# Altium PCB CT310高端控制盒基板电路V1.1.PcbDoc (part 2 of 3)
Units mil, origin at the board's own origin, x right, y up, seen from the top; angles counter-clockwise.
Board outline 8162.61 x 6196.81 mil, 2 copper layers (Top Layer, Bottom Layer), stack 65.792 mil thick; 275 components, 181 nets, 942 pads, 304 vias.
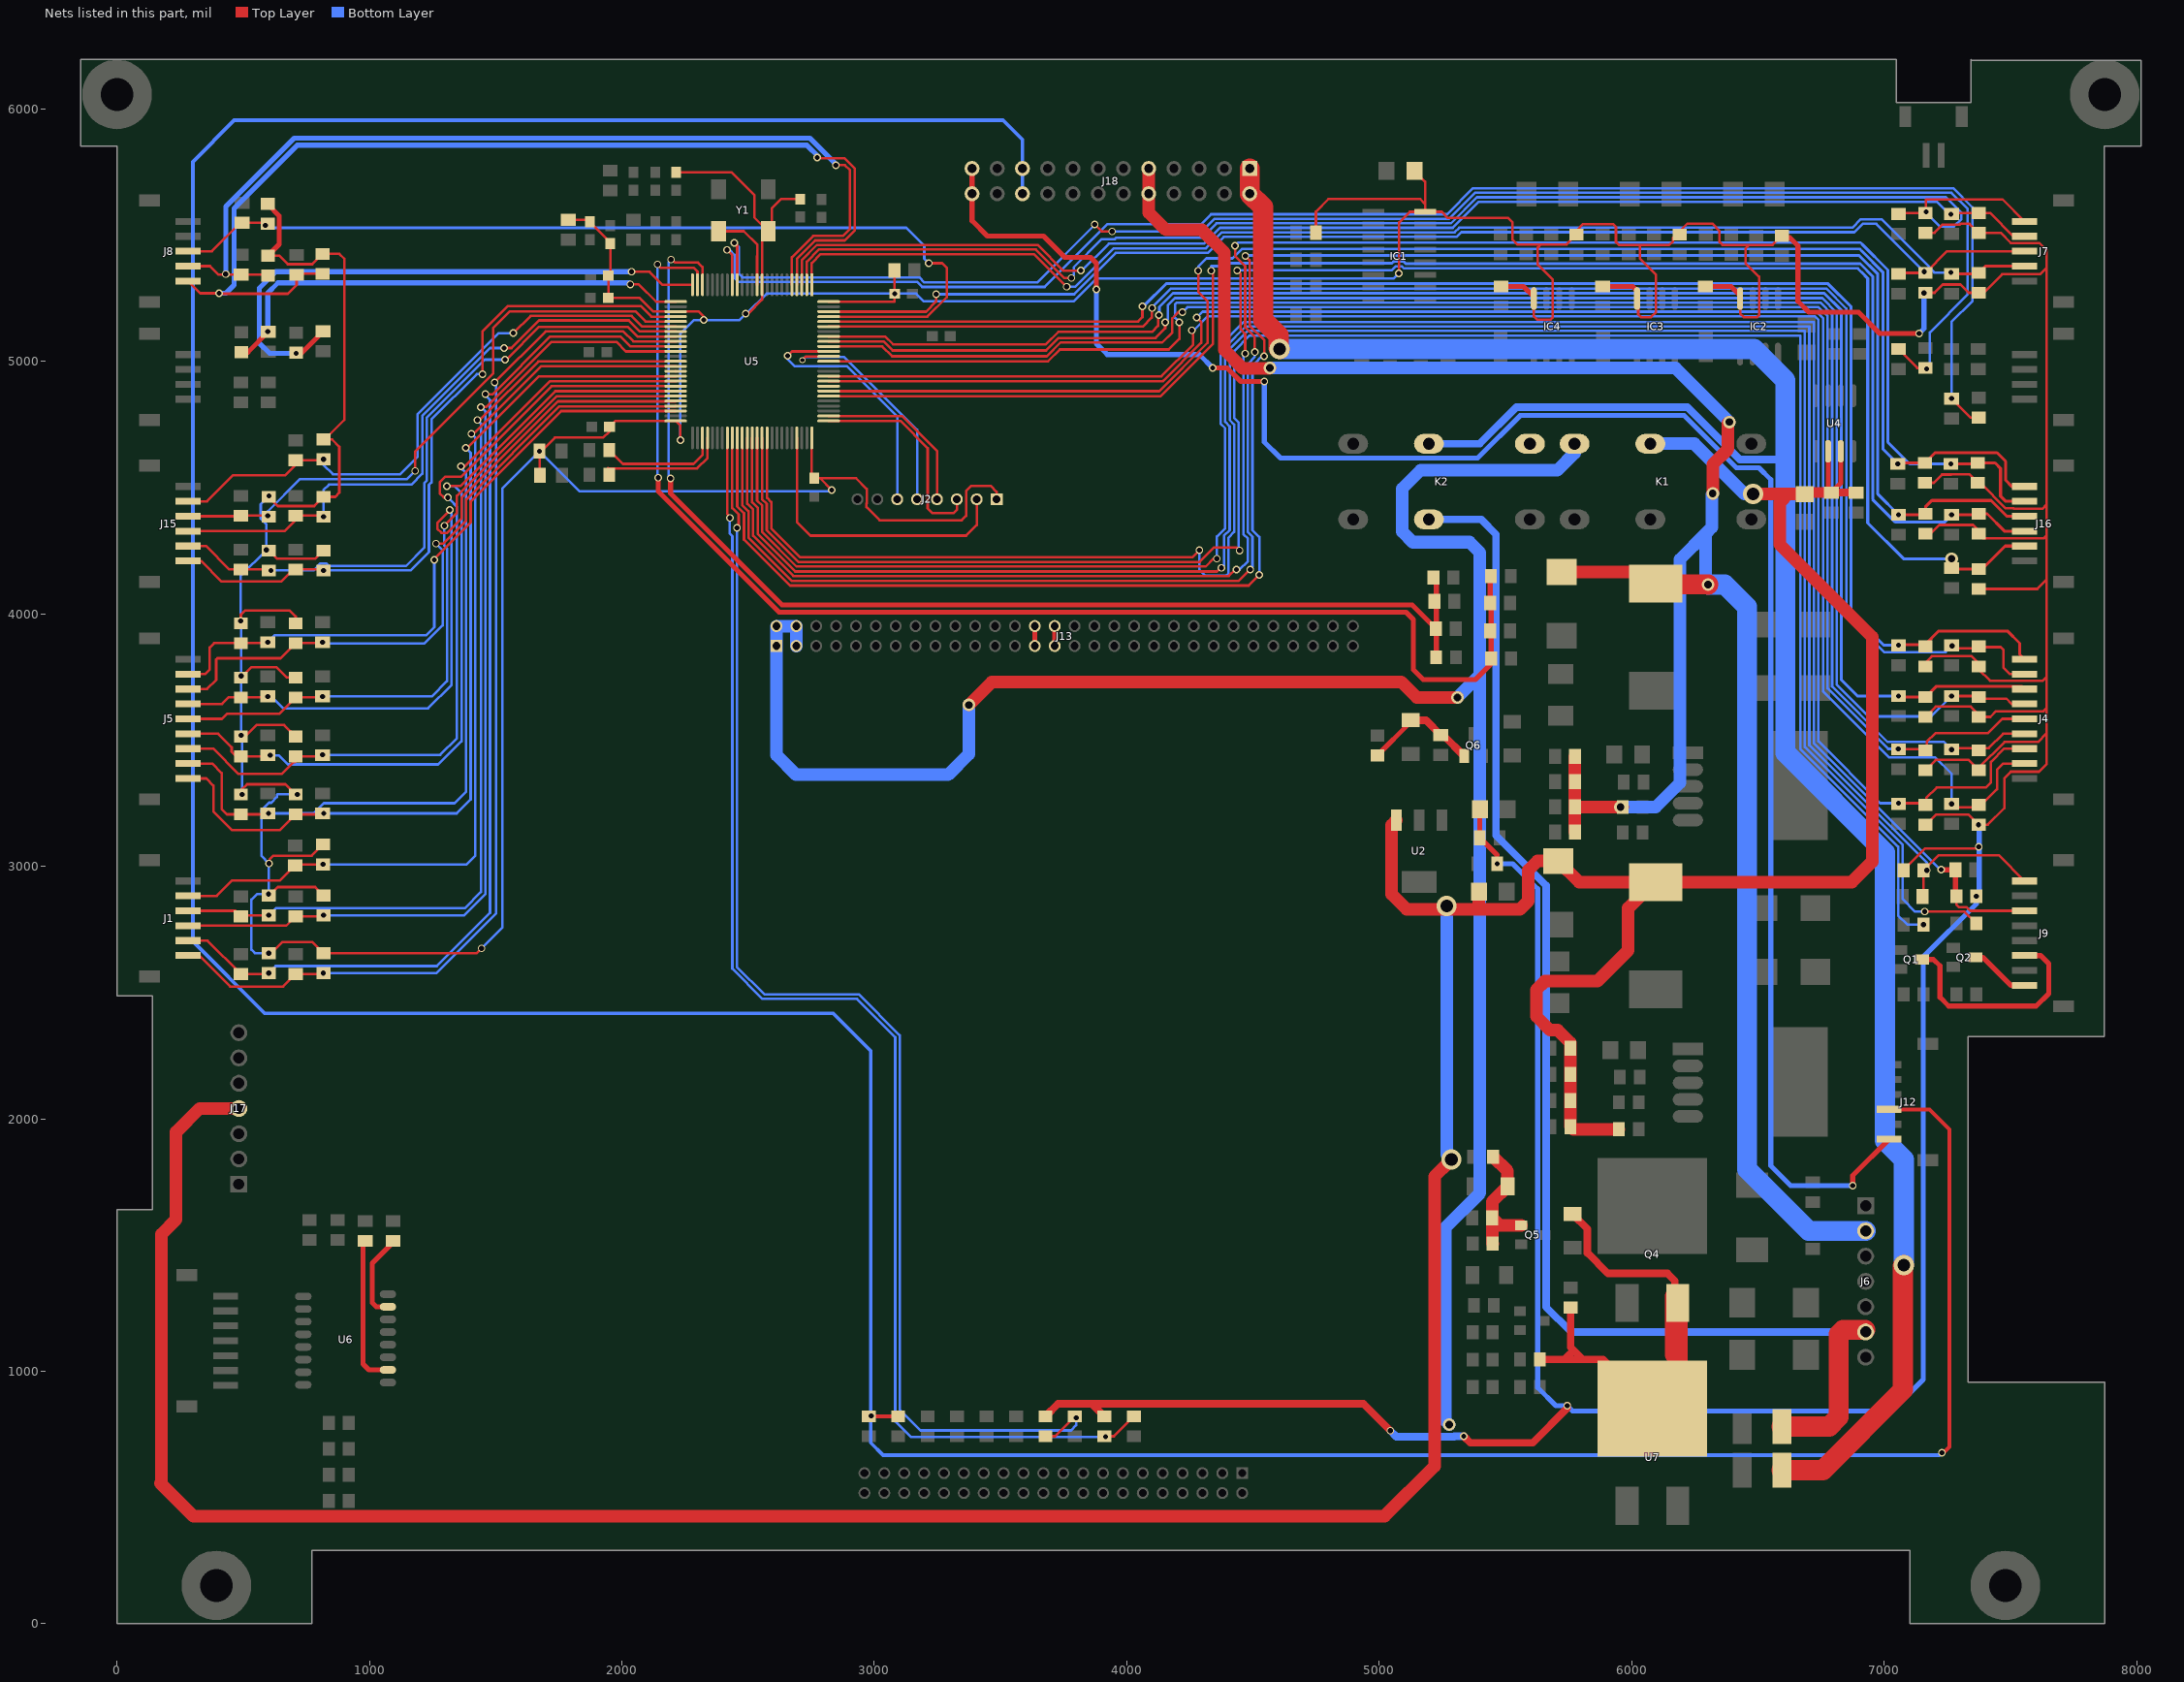
[diagram p2: the nets of this part, all layers, seen from the top]

## Via types
v1: diameter 30, hole 20, Top Layer to Bottom Layer, tented both sides, 229 vias
v2: diameter 60, hole 30, Top Layer to Bottom Layer, tented both sides, 35 vias
v3: diameter 50, hole 30, Top Layer to Bottom Layer, tented both sides, 22 vias
v4: diameter 80, hole 50, Top Layer to Bottom Layer, tented both sides, 12 vias
v5: diameter 50, hole 28, Top Layer to Bottom Layer, tented both sides, 4 vias
v6: diameter 24, hole 16, Top Layer to Bottom Layer, tented both sides, 1 vias
v7: diameter 30, hole 16, Top Layer to Bottom Layer, tented both sides, 1 vias

## Nets (pads, with @x,y where several pads share a name; then routed paths per layer and width w, separated by ;. In a path a pad name is that pad's centre, name@x,y a point inside that pad or via, vN(x,y) a via of type N, cw(c..) or ccw(c..) an arc to the next point about the centre after c; other vN are vias at no path point) (continued)
+3.3V_S: C6.1 C9.2 C92.2 C93.2 C95.2 C96.1 C97.1 C98.1 C100.1 C102.1 C104.1 C108.1 C112.2 C113.2 C114.2 C115.2 D60.1 D61.1 IC1.16 IC2.8 IC3.8 IC4.8 J2.1 L1.1 L4.1 R13.2 R14.2 R15.2 R16.2 R17.2 R23.2 R24.2 R25.2 R26.2 R31.2 R32.2 R33.2 R34.2 R39.2 R40.2 R41.2 R42.2 R45.1 R47.2 R48.2 R49.2 R50.2 R53.1 R55.2 R56.2 R59.2 R60.2 R61.2 R65.2 R66.2 R67.2 R71.2 R72.2 R73.2 R77.2 R78.2 R79.2 R85.2 R86.2 R89.2 R90.2 R93.2 R99.1 R109.1 R112.1 R115.1 U5.11 U5.28 U5.50 U5.75 U5.100 Y1.4 | length 38986.3
  Top Layer w10: R33.2@491,3301.3 514.93,3325.22 667.09,3325.22 R25.2@707.65,3284.67 ; R50.2@491,3972 491,3997.3 507.7,4014 683.7,4014 707.65,3990.06 R42.2@707.65,3962.73 ; R34.2@494.49,3751.22 531.56,3788.29 632.27,3788.29 672.83,3747.73 R26.2@707.65,3747.73 ; R49.2@507.37,3514.67 552.7,3560 662.31,3560 R41.2@707.65,3514.67 ; R77.2@598.41,5419.01 642.86,5419.01 676.7,5385.17 773.47,5385.17 R71.2@814.03,5425.73 880.98,5425.73 900.7,5406 900.7,4768 R79.2@823.74,4691.04 ; R61.2@601.32,4250.67 633.99,4218 672.75,4218 ; R73.2@601.32,4462.38 636.7,4427 781.3,4427 R67.2@817.97,4463.67 864.37,4463.67 880.7,4480 880.7,4662 851.67,4691.04 R79.2@823.74,4691.04 ; R16.2@604.7,2886 636.7,2918 784.82,2918 R15.2@817.97,2884.85 ; 604.7,3027 619.7,3042 771.37,3042 R17.2@815.97,3086.6 ; R14.2@611.06,2656.35 654.7,2700 774.32,2700 R13.2@817.97,2656.35 1425.06,2656.35 v1(1443.7,2675) ; 672.77,4217.98 785.28,4217.98 R56.2@817.97,4250.67 ; R79.2@817.97,4691.04 R79.2@823.74,4691.04 ; D61.1@1675.66,4548.69 1673.69,4550.65 v1(1673.69,4644.29) 1680.46,4644.29 1734.16,4698 1925.7,4698 1951.34,4723.63 C102.1@1951.34,4741.29 1974.12,4764.07 U5.50@2212.85,4764.07 2231.7,4745.22 v1(2231.7,4688) ; C95.2@1787,5560.67 1865.13,5560.67 C92.2@1873,5552.79 1954,5471.79 L4.1@1954,5467.18 1954,5347.86 C97.1@1946.43,5340.3 1946.43,5251.39 C104.1@1946.34,5251.29 2070.41,5251.29 2124.56,5197.14 U5.28@2212.85,5197.14 ; U5.28@2213,5197.3 ccw(c2213,5197.14) U5.28@2212.85,5197.14 ; C93.2@2215,5748.73 2434.98,5748.73 2524.7,5659 2524.7,5570.34 Y1.4@2579.43,5515.62 ; v1(2324.7,5164) 2324.7,5177 2303.62,5198.08 2211.91,5198.08 U5.28@2212.85,5197.14 ; v1(2490.7,5189) 2500,5189 2555.37,5244.37 U5.11@2555.37,5303.44 2555.37,5491.56 Y1.4@2579.43,5515.62 ; R99.1@2706,5642.73 2630.43,5642.73 2593.7,5606 2593.7,5529.9 Y1.4@2579.43,5515.62 ; U5.75@2752.22,4697.15 2752.22,4546.92 C100.1@2761.71,4537.43 2784.27,4537.43 ; U5.100@2819.15,5236.51 3080.47,5236.51 v1(3080.47,5268.29) C96.1@3080.47,5355 ; v1(2831.7,4490) 2784.27,4537.43 ; J2.1@3484.3,4454 3484.3,4483.41 3460.7,4507 3384.7,4507 3363.44,4485.73 3363.44,4388.73 3345.7,4371 3020.7,4371 2968.7,4423 2968.7,4436.77 2969.74,4437.8 2969.74,4494.97 2927.27,4537.43 2784.27,4537.43 ; C108.1@4749.02,5509.89 4749.02,5593.32 4799,5643.3 5162,5643.3 5181.36,5623.93 ; v1(5077,5349) 5078.7,5350.7 5078.7,5550 5121,5592.3 IC1.16@5181.36,5592.3 ; C112.2@5139.12,5754 5181.36,5711.76 5181.36,5623.93 ; IC4.8@5612.44,5249.05 5612.44,5178.28 5625.72,5165 5678.72,5165 5686.72,5173 5686.72,5204.25 5687.44,5204.98 5687.44,5323.28 5627.72,5383 5627.72,5451 5639.72,5463 ; IC3.8@6020.94,5249.05 6025.72,5244.28 6025.72,5186 6036.72,5175 6076.17,5175 6095.94,5194.78 6095.94,5343.33 6032.72,5406.56 6032.72,5460.27 ; IC2.8@6429.44,5249.05 6429.44,5189.28 6443.72,5175 6496.72,5175 6504.44,5182.72 6504.44,5335.28 6450.72,5389 6450.72,5446.2 6465.52,5461 ; R109.1@6594.73,5497.39 6558.35,5461 6465.52,5461 ; R86.2@7076.63,2984.29 7163.34,3071 v1@7364.7,3071 ; R55.2@7160.98,4519.3 7196.42,4519.3 7229.11,4551.98 7264.68,4551.98 7266,4553.3 7337,4553.3 R60.2@7371,4519.3 7380.41,4519.3 7481.7,4418 7511.7,4418 7513.7,4416 7626.7,4416 7642.7,4432 ; R40.2@7163.98,3164.93 7165.63,3164.93 7206.19,3205.48 7301.93,3205.48 7303.12,3204.3 7334.63,3204.3 v1(7374,3164.92) 7410.63,3164.92 7475.7,3230 7475.7,3348.93 7501.63,3374.85 7613.56,3374.85 7642.7,3404 7642.7,3526 ; R24.2@7163.98,3380.93 7204.54,3421.48 7334.81,3421.48 R32.2@7369,3387.3 ; R39.2@7163.98,3591.93 7204.54,3632.48 7342.81,3632.48 R47.2@7374,3601.3 ; R23.2@7164,3807.3 7189.19,3832.48 7345.81,3832.48 R31.2@7374,3804.3 ; R66.2@7163.98,4317.43 7184.13,4317.43 7219,4352.3 7352.41,4352.3 R72.2@7376.7,4328 ; R89.2@7163.98,5271.93 7199.4,5271.93 7232.09,5304.61 7301.91,5304.61 7334.6,5271.93 R93.2@7373.98,5271.93 7394.63,5271.93 7467.7,5345 7617.7,5345 7642.7,5370 ; R59.2@7163.98,5508.93 7199.4,5508.93 7232.09,5541.61 7299.32,5541.61 7302.7,5545 7337.91,5545 R65.2@7373.98,5508.93 7461.28,5508.93 7501.63,5468.57 7615.13,5468.57 7642.7,5441 7642.7,5370 ; R32.2@7374,3380.93 7374,3390.1 7476.87,3492.96 7609.67,3492.96 7642.7,3526 ; R47.2@7374,3591.92 7420.63,3591.92 7442.7,3614 7630.7,3614 7642.7,3626 ; R31.2@7374,3791.93 7374,3780.7 7419.7,3735 7501.31,3735 7501.63,3734.68 7627.39,3734.68 7642.7,3750 ; R78.2@7374,4098.93 7606.63,4098.93 7642.7,4135 ; R72.2@7374,4317.43 7391.43,4300 7633.7,4300 7642.7,4309 ; IC1.16@5181.36,5592.3 5247.41,5592.3 5271.7,5568 5510.72,5568 5527.72,5551 5527.72,5482 5546.72,5463 5639.72,5463 ; IC1.16@5181.36,5592.3 5181.36,5623.93 ; 5639.72,5463 5742.35,5463 R115.1@5781.73,5502.39 5781.73,5518.02 5807.72,5544 5925.72,5544 5937.72,5532 5937.72,5473 5950.45,5460.27 6032.72,5460.27 ; 6032.72,5460.27 6147.62,5460.27 6163.53,5476.19 6163.53,5488.81 6220.72,5546 6318.69,5546 6334.29,5530.39 6334.29,5529.43 6347.72,5516 6347.72,5473 6359.72,5461 6465.52,5461 ; 7642.7,3526 7642.7,3626 ; 7642.7,3626 7642.7,3750 ; 7642.7,3750 7642.7,4135 ; 7642.7,4135 7642.7,4309 ; 7642.7,4309 7642.7,4432 ; 7642.7,4432 7642.7,5370
  Top Layer w20: R85.2@597.39,5624.01 597.39,5621.91 642.95,5576.35 642.95,5463.55 R77.2@598.41,5419.01 ; C6.1@5403.88,3219.3 5397.98,3213.39 C9.2@5397.98,3113.3 5466.87,3044.4 ; C115.2@5482.7,5296.95 5570.8,5296.95 5612.44,5255.31 IC4.8@5612.44,5249.05 ; C114.2@5888.73,5296.95 6003.8,5296.95 6020.94,5279.81 IC3.8@6020.94,5249.05 ; C113.2@6291.13,5296.95 6393.8,5296.95 6429.44,5261.31 IC2.8@6429.44,5249.05 ; R109.1@6594.73,5497.39 6602.44,5489.68 6626.96,5489.68 6658.7,5457.94 6658.7,5238 6701.36,5195.35 6898.12,5195.35 6982.46,5111 v1(7138.7,5111)
  Top Layer w30: R53.1@3677.7,821.37 3728.33,872 3860.41,872 ; R45.1@3911.04,821.37 3860.41,872 ; v1(5043.7,765) 4936.7,872 3860.41,872 ; v1(5334.7,743) 5360.7,717 5607.7,717 5744.7,854 v1(5744.7,864)
  Bottom Layer w10: v1(495.37,3284.67) 495.37,3522.33 v1(491.7,3518.67) v1(491.7,3754) 491.7,3970 v1(489.7,3972) 489.7,4151 v1(591.7,4253) 591.7,4354.94 569.38,4377.26 569.38,4434.68 v1(601.7,4467) ; v1@600.7,3009 v1(600.7,2890) 554.7,2890 532.7,2868 532.7,2670 546.35,2656.35 v1(601.32,2656.35) ; v1(602.7,3011) 571.7,3042 571.7,3220.6 603.11,3252 611.44,3252 633.7,3274.26 633.7,3282.6 636.11,3285 v1(714.7,3285) ; v1(1443.7,2675) 1526.7,2758 1526.7,4497.31 v1(1673.69,4644.29) 1832.99,4485 2826.7,4485 v1(2831.7,4490) ; v1(2231.7,4688) 2231.7,5110 2285.7,5164 v1(2324.7,5164) 2465.7,5164 v1(2490.7,5189) 2493.7,5189 2573,5268.29 v1(3080.47,5268.29) 3165.81,5268.29 3196.11,5238 3789.13,5238 3879.13,5328 5056,5328 v1(5077,5349)
  Bottom Layer w20: v1(5466.87,3010.3) 5528.74,3010.3 5627.7,2911.33 5627.7,936 5699.7,864 v1(5744.7,864) 5765.7,843 7030.38,843 7155.17,967.79 7155.17,2641.46 7364.94,2851.23 v1(7364.94,2881.77) 7376.7,2893.54 v1@7376.7,3164.92 ; v1(7138.7,5111) 7157.7,5130 v1(7157.7,5271)
  Bottom Layer w30: v1(5043.7,765) 5067.7,741 5296.59,741 5298.59,743 v1(5334.7,743)
  other v1: 7374.7,3077
+5V_OUT: J13.1 J13.2 J13.3 J13.4 K1.4 | length 8900.8
  Top Layer w50: v3(3374.7,3639) 3465.7,3730 5087.7,3730 5148.7,3669 v3(5309.7,3669)
  Bottom Layer w50: J13.3@2690.89,3872.87 J13.4@2690.89,3951.61 J13.2@2612.15,3951.61 J13.1@2612.15,3872.87 2612.15,3440.56 2689.7,3363 3292.7,3363 3374.7,3445 v3(3374.7,3639) ; v3(5276.7,789) 5261.7,804 5261.7,1569.25 5398.7,1706.25 5398.7,4036 ; v3(5309.7,3669) 5398.7,3758 5398.7,4036 ; K1.4@5773.7,4674 5773.7,4637 5705.7,4569 5163.7,4569 5090.7,4496 5090.7,4326 5132.7,4284 5357.7,4284 5398.7,4243 5398.7,4036
+5V_S: C4.1 C7.1 C10.2 C11.2 C13.2 C14.2 C79.2 C80.2 C81.2 J17.4 K1.3 L2.1 R2.1 U2.3 U4.2 U4.3 | length 16121.1
  Top Layer w20: C79.2@6685.41,4474.41 6703.61,4492.61 6778.12,4492.61 U4.2@6778.12,4644.05 ; C80.2@6790.41,4480.32 6828.12,4518.03 U4.3@6828.12,4644.05
  Top Layer w30: C79.2@6685.41,4474.41 6784.5,4474.41 C80.2@6790.41,4480.32 C81.2@6889.41,4480.32
  Top Layer w50: J17.4@482.7,2041 327.7,2041 234.2,1947.5 234.2,1601.27 175.7,1542.77 175.7,559 172.7,556 302.26,426.44 5021.38,426.44 5218.7,623.76 5218.7,1772 v4@5275.7,1829 ; U2.3@5067.45,3182.34 5048.7,3163.6 5048.7,2889.65 5108.36,2830 5394.59,2830 ; C4.1@5394.59,2900 5394.59,2830 ; R2.1@5948.76,1958.3 5767.78,1958.3 C11.2@5756.78,1969.3 C13.2@5756.78,2280.29 5756.78,2301.37 5706.43,2351.72 5676.11,2351.72 5622.56,2405.28 5622.56,2511.36 5656.19,2545 5864.11,2545 5986.41,2667.3 5986.41,2834.89 6089.41,2937.89 5791.8,2937.89 C7.1@5708.7,3020.98 5626.69,3020.98 5590.7,2985 5590.7,2863 5557.7,2830 5394.59,2830 ; L2.1@6094.7,2937.89 6871.89,2937.89 6952.7,3018.7 6952.7,3908.94 6586.7,4274.94 6586.7,4440 6603.7,4457 ; v4(6480.7,4474.41) C79.2@6685.41,4474.41
  Bottom Layer w50: v4(5266.7,2843) 5266.7,1858 v4(5285.7,1839) ; K1.3@6073.7,4674 6247.7,4674 6447.29,4474.41 v4(6480.7,4474.41)
+7.2V_S: C72.1 C73.2 C74.2 C75.2 C88.2 J6.2 J18.9 J18.10 L3.1 R30.1 | length 8945.7
  Top Layer w50: J18.9@4086.75,5763.97 J18.10@4086.75,5663.97 4086.75,5589.25 4155.5,5520.5 4297.5,5520.5 4386.7,5431.3 4386.7,5045.12 4459.82,4972 4564.7,4972 v3(4566.7,4974) ; C72.1@5722.7,4165.98 L3.1@6049.32,4165.98 ; C88.2@5775.07,3136 C75.2@5775.07,3235.67 ; C73.2@5775.07,3435 C74.2@5775.07,3335.33 C75.2@5775.07,3235.67 ; R30.1@5963.68,3235.67 C75.2@5775.07,3235.67 ; v3(6320.7,4477) 6320.7,4592 6381.65,4652.94 6381.65,4754.94 v3(6386.7,4760)
  Top Layer w80: L3.1@6198.01,4117 6301.7,4117 v3(6302.7,4116)
  Bottom Layer w50: v3(4566.7,4974) 6172.7,4974 v3(6386.7,4760) ; v3(5955.69,3235.01) 6094.72,3235.01 6190.7,3331 6190.7,4216 6293.2,4318.5 ; v3(6302.7,4116) 6293.2,4125.5 6293.2,4318.5 ; v3(6320.7,4477) 6317.7,4474 6317.7,4343 6293.2,4318.5
  Bottom Layer w80: v3(6302.7,4116) 6368.7,4116 6456.7,4028 6456.7,1801 6701.7,1556 J6.2@6926.7,1556
BAT1+: F1.1 J18.1 J18.2 K2.3 | length 9193.9
  Top Layer w80: J18.1@4486.75,5763.97 J18.2@4486.75,5663.97 4539.7,5611.02 4539.7,5164 4600.7,5103 4600.7,5053.3 v4(4605,5049) ; F1.1@6594.44,608 6756.7,608 7074.7,926 7074.7,1417 v4(7077.7,1420)
  Bottom Layer w30: K2.3@5196.7,4674 5397.7,4674 5542.7,4819 6220.82,4819 6428.19,4611.63 6586.13,4611.63 6608.76,4589
  Bottom Layer w80: v4(4605,5049) 4654.7,5049 4654.34,5049.37 6484.34,5049.37 6608.76,4924.94 6608.76,4589 6608.76,3449.42 7002.7,3055.48 7002.7,1914.5 7077.7,1839.5 v4(7077.7,1420)
BAT1_ADC: C15.1 C17.1 R21.2 R27.2 U5.23 | length 4696.1
  Top Layer w10: v1(2194.7,5403) 2198.7,5403 2210.41,5391.3 2302,5391.3 2319.15,5374.14 U5.23@2319.15,5303.44
  Top Layer w20: v1(2192.7,4537) 2192.7,4476.46 2634.16,4035 5130.33,4035 C15.1@5224.04,3941.3 ; R27.2@5226.04,3828.3 R21.2@5226.04,4130.3
  Bottom Layer w10: v1@2194.7,4537 2185.7,4546 2185.7,5394 v1(2194.7,5403)
BAT2+: F2.1 J6.6 K2.6 | length 5419.9
  Top Layer w80: F2.1@6594.44,781 6781.71,781 6819.7,819 6819.7,1146 6837.7,1164 J6.6@6924.7,1164
  Bottom Layer w30: K2.6@5196.7,4374 5403.7,4374 5462.7,4315 5462.7,3123 5660.7,2925 5660.7,1255 5759.7,1156 J6.6@6926.7,1156
BAT2_ADC: C16.1 C18.1 R22.2 R28.2 U5.24 | length 5306.2
  Top Layer w10: v1@2139.7,5384 v1(2140.7,5384) ; v1@2140.2,5383.5 2153.41,5370.3 2285,5370.3 2299.46,5355.83 U5.24@2299.46,5303.44
  Top Layer w20: v1(2143.7,4539) 2143.7,4485.86 2622.57,4007 5105.7,4007 5134.7,3978 5134.7,3779.4 5174.11,3740 5380.68,3740 5441.98,3801.3 C16.1@5441.98,3912.28 ; R22.2@5439.04,4145.7 C18.1@5439.04,4043.3 5442.98,4039.36 R28.2@5442.98,3823.28
  Bottom Layer w10: v1@2140.7,4539 v1(2140.7,5384)
BAT_IN: D3.2 Q4.3 R9.2 R12.1 U7.2 | length 2109
  Top Layer w30: R9.2@5636.37,1047.3 5734,1047.3 ; 5755.11,1068.41 5734,1047.3 ; R12.1@5758.11,1252.99 5758.11,1095 5805.81,1047.3 ; D3.2@5765,1623.22 5824.7,1563.52 5824.7,1468.84 5906.25,1387.3 6141.7,1387.3 6171,1358 Q4.3@6171,1295.65 ; U7.2@6082,852 5886.7,1047.3 5805.81,1047.3 ; 5734,1047.3 5805.81,1047.3
  Top Layer w80: U7.2@6082,852 6182,952 Q4.3@6182,1270.65 ; 6171,1067.25 6171,1079.25 ; Q4.3@6171,1295.65 6171,1079.25 ; 6176,1079.25 6171,1079.25
CLOCK: U5.12 Y1.3 | length 335.1
  Top Layer w10: Y1.3@2382.57,5515.62 2482.68,5515.62 2536.7,5461.6 2536.7,5417.4 2535.68,5416.38 U5.12@2535.68,5303.44
CVBS: J12.4 J18.19 J18.20 R46.2 R51.2 | length 17057.3
  Top Layer w15: R51.2@2977.7,821.37 R46.2@3094.37,821.37 ; J12.4@7019.93,2037.47 7179.17,2037.47 7258.32,1958.33 7258.32,700.61 7235.7,678 v1(7228.7,678)
  Bottom Layer w15: J18.20@3586.75,5663.97 J18.19@3586.75,5763.97 3586.75,5878.25 3510,5955 464.64,5955 300.2,5790.56 300.2,2702.56 584.8,2417.96 2836.68,2417.96 2985.74,2268.9 2985.74,716.96 3034.2,668.5 7219.2,668.5 v1(7228.7,678)
  other v1: 2987.7,823
GND_P: K2.1
JNRST: J2.6 U5.90 | length 1039.1
  Top Layer w10: v1(2656.7,5022) 2674.37,5039.66 U5.90@2819.15,5039.66
  Bottom Layer w10: v1(2656.7,5022) 2656.7,5009 2685.41,4980.3 2725.36,4980.3 2726.06,4981 2891.25,4981 3090.6,4781.65 J2.6@3090.6,4454
JOYSTICK_LEFTX: C23.1 R6.1 U5.16 | length 6205.2
  Top Layer w10: v1(2445.7,5470) 2456.94,5458.76 U5.16@2456.94,5303.44 ; v1(3872.7,5542) 3899.7,5515 v1(3941.7,5515) ; C23.1@7057,5048.73 7131.8,4973.92 R6.1@7163.98,4973.92
  Bottom Layer w10: v1(2445.7,5470) 2463.7,5452 2463.7,5346 2477.41,5332.29 3177.85,5332.29 3197.14,5313 3644.7,5313 3872.7,5541 v1(3872.7,5542) ; 3957,5515 4298,5515 4348,5565 5276.37,5565 5379.37,5668 7266.2,5668 7331.02,5603.18 7331.02,5265.32 7180.7,5115 7180.7,4981 7169.7,4970 v1(7167.7,4970)
JOYSTICK_LEFTY: C25.1 R8.1 U5.17 | length 6316.6
  Top Layer w10: v1(2416.7,5442) 2437.26,5421.44 U5.17@2437.26,5303.44 ; v1(7267.02,4852.73) 7341.82,4777.93 R8.1@7374,4777.93
  Bottom Layer w10: v1(2416.7,5442) 2425.7,5442 2445.7,5422 2445.7,5331 2462.41,5314.29 3170.39,5314.29 3189.69,5295 3674.3,5295 3922.3,5543 4294,5543 4334,5583 5268.91,5583 5371.91,5686 7273.65,5686 7349.02,5610.63 7349.02,5238 7267.02,5156 v1(7267.02,4852.73)
JOYSTICK_RIGHTX: C24.1 R7.1 U5.26 | length 1956
  Top Layer w10: v1(2033.7,5305) 2066.7,5305 2135.19,5236.51 U5.26@2212.85,5236.51
  Top Layer w20: R7.1@493,5036.93 518.61,5036.93 C24.1@599.35,5117.67
  Bottom Layer w20: v1(597.04,5117.67) 597.04,5270.33 637.7,5311 2027.7,5311 v1(2033.7,5305)
JOYSTICK_RIGHTY: C26.1 R29.1 U5.25 | length 2288.1
  Top Layer w10: v1(2038.7,5355) 2109.7,5355 2161.26,5303.44 U5.25@2279.78,5303.44
  Top Layer w20: v1(709.65,5031.94) R29.1@709.65,5034.93 732.26,5034.93 C26.1@816,5118.67
  Bottom Layer w20: v1(709.65,5031.94) 604.76,5031.94 564.04,5072.67 564.04,5290.33 628.7,5355 v1(2038.7,5355)
JTCK: J2.3 U5.76 | length 846.2
  Top Layer w10: U5.76@2819.15,4764.07 3103.63,4764.07 3211.45,4656.25 3211.45,4417.25 3229.7,4399 3313.7,4399 3326.82,4412.11 J2.3@3326.82,4454
JTDI: J2.4 U5.77 | length 677.5
  Top Layer w10: U5.77@2819.15,4783.76 3109.4,4783.76 3248.08,4645.09 J2.4@3248.08,4454
JTDO: J2.5 U5.89 | length 964.2
  Top Layer w10: v6(2715,5005.3) 2729.69,5019.98 U5.89@2819.15,5019.98
  Bottom Layer w10: v6(2715,5005.3) 2727.7,5018 2879.7,5018 3169.34,4728.37 J2.5@3169.34,4454
JTMS: J2.2 U5.72 | length 1187.6
  Top Layer w10: U5.72@2693.16,4697.15 2693.16,4363.69 2746.85,4310 3363.7,4310 3405.56,4351.85 J2.2@3405.56,4454
KEYSWIN_ED: C51.1 J16.2 R60.1 U5.61 | length 7844.2
  Top Layer w10: U5.61@2476.63,4697.15 2476.63,4430.99 2501.7,4405.91 2501.7,4301.81 2673.51,4130 4442.7,4130 v1(4488.7,4176) ; v1(4429,5458) 4429,5418 4468.7,5378.3 4468.7,5134.59 4506.7,5096.59 v1(4506.7,5037)
  Top Layer w12: v1(7264.02,4594.1) 7367.06,4594.1 R60.1@7371,4598.04 7439.26,4598.04 7461,4576.3 7461,4466.3 7481.42,4445.88 J16.2@7556.23,4445.88
  Bottom Layer w10: v1(4429,5458) 4442,5471 6905.84,5471 6914,5462.84 ; v1(4488.7,4176) 4497.7,4185 4497.7,4305.54 4479.43,4323.82 4479.43,4990.18 4506.7,5017.46 v1(4506.7,5037)
  Bottom Layer w12: 6914,5462.84 7014.7,5362.14 7014.7,4680 7100.6,4594.1 v1(7264.02,4594.1)
KEYSWIN_EL: C54.1 J16.3 R66.1 U5.60 | length 7975
  Top Layer w10: U5.60@2456.94,4697.15 2456.94,4425.22 2483.7,4398.46 2483.7,4294.35 2666.06,4112 4482.7,4112 v1(4524.7,4154) ; v1(4470,5418) 4486.7,5401.3 4486.7,5142.05 4544.7,5084.05 4544.7,5020.7 v1(4544,5020)
  Top Layer w12: v1(7057,4392.23) 7160.04,4392.23 R66.1@7163.98,4396.17 7163.98,4424.27 7189,4449.3 7423.54,4449.3 7486.01,4386.82 J16.3@7556.23,4386.82
  Bottom Layer w10: v1(4524.7,4154) 4524.7,4304 4497.43,4331.27 4497.43,4982.73 4544,5029.3 v1(4544,5020)
  Bottom Layer w12: v1@4475,5419 6901.27,5419 6974.7,5345.57 6974.7,4474.53 v1(7057,4392.23)
KEYSWIN_EM: C60.1 J16.5 R78.1 U5.62 | length 7865.4
  Top Layer w10: U5.62@2496.31,4697.15 2496.31,4436.76 2519.7,4413.37 2519.7,4309.27 2678.97,4150 4403.7,4150 v1@4431.7,4178 ; v1(4437,5360) 4450.7,5346.3 4450.7,5127.14 4468.7,5109.14 v1(4468.7,5031)
  Top Layer w12: C60.1@7267.02,4181.6 v5(7267.02,4218.32) ; C60.1@7270.96,4177.67 R78.1@7374,4177.67 7388.37,4177.67 7479.42,4268.71 J16.5@7556.23,4268.71
  Bottom Layer w10: v1(4434.7,4175) 4446.7,4175 4479.7,4208 4479.7,4298.09 4461.43,4316.36 4461.43,5023.73 v1(4468.7,5031) ; v1@4437,5361 5049.4,5361 5065.4,5377 5088.6,5377 5097.6,5368 6895.7,5368 6910.85,5352.85
  Bottom Layer w12: 6910.85,5352.85 6934.7,5329 6934.7,4360 7076.39,4218.32 v5(7267.02,4218.32)
KEYSWIN_ER: C57.1 J16.4 R72.1 U5.81 | length 6118.6
  Top Layer w10: U5.81@2819.15,4862.5 2820.08,4861.56 4133.64,4861.56 4340.89,5068.82 4340.89,5352.11 v1(4334,5359)
  Top Layer w12: v1(7267.02,4392.23) 7370.06,4392.23 R72.1@7374,4396.17 7408.13,4396.17 7476.53,4327.77 J16.4@7556.23,4327.77
  Bottom Layer w12: 4334,5377 4392.87,5377 4404.87,5389 5050.53,5389 5057.53,5396 5096.47,5396 5105.47,5387 6904.99,5387 6954.7,5337.28 6954.7,4453.52 7044.99,4363.23 7238.02,4363.23 v1(7267.02,4392.23)
KEYSWIN_EU: C48.1 J16.1 R55.1 U5.82 | length 6064.1
  Top Layer w10: U5.82@2819.15,4882.18 4128.8,4882.18 4319.7,5073.09 4319.7,5238.6 4283,5275.3 v1(4283,5359)
  Top Layer w12: v1(7054,4594.1) 7057.94,4598.04 R55.1@7160.98,4598.04 7201.24,4638.3 7447,4638.3 7481,4604.3 7481,4529.3 7505.36,4504.93 J16.1@7556.23,4504.93
  Bottom Layer w10: 4283,5375 4316,5408 4418.6,5408 4456.6,5446 6902.56,5446 6911,5437.56
  Bottom Layer w12: 6911,5437.56 6994.7,5353.85 6994.7,4653.39 v1(7054,4594.1)
KEYSWIN_FD: C52.1 J15.2 R61.1 U5.33 | length 2690.6
  Top Layer w10: J15.2@281.77,4268.71 351.99,4268.71 444.84,4175.86 C52.1@491.03,4175.86 597.39,4175.86 R61.1@601.32,4171.93 v1(609.78,4171.93) ; v1(1536.7,5007) 1542.16,5007 1672.16,5137 2023.3,5137 2061.57,5098.72 U5.33@2212.85,5098.72
  Bottom Layer w10: v1(609.78,4171.93) 778.37,4171.93 806.37,4199.93 829.57,4199.93 839.57,4189.93 1144.63,4189.93 1217.7,4263 1217.7,4518.46 1227.7,4528.46 1227.7,4777.46 1457.25,5007 v1(1536.7,5007)
KEYSWIN_FL: C55.1 J15.3 R67.1 U5.32 | length 2484.7
  Top Layer w10: J15.3@281.77,4327.77 663.47,4327.77 707.68,4371.97 C55.1@707.68,4388.86 R67.1@814.03,4388.86 ; v1(1533.7,5053) 1562.7,5053 1672,5162.3 2027,5162.3 2070.89,5118.4 U5.32@2212.85,5118.4
  Bottom Layer w10: v1(817.97,4384.92) 817.97,4490.26 839.7,4512 1166.3,4512 1209.7,4555.4 1209.7,4784.91 1477.79,5053 v1@1519.7,5053
KEYSWIN_FM: C61.1 J15.5 R79.1 U5.31 | length 2418.9
  Top Layer w10: J15.5@281.77,4445.88 356.58,4445.88 459.7,4549 666.7,4549 707.68,4589.97 C61.1@707.68,4608.36 R79.1@814.03,4608.36 ; v1(1569.7,5112) 1638,5180.3 2039,5180.3 2081.2,5138.09 U5.31@2212.85,5138.09
  Bottom Layer w10: v1(817.97,4612.3) 817.97,4590.74 855.7,4553 1121.7,4553 1190.7,4622 1190.7,4791.37 1511.34,5112 v1(1569.7,5112)
KEYSWIN_FR: C58.1 J15.4 R73.1 U5.30 | length 2450.5
  Top Layer w10: J15.4@281.77,4386.82 488.99,4386.82 C58.1@491.03,4388.86 v1(597.38,4388.86) R73.1@601.32,4384.92 ; v1(1180.7,4566) 1180.7,4642.4 1490.7,4952.4 1490.7,5133 1556,5198.3 2053,5198.3 2093.52,5157.77 U5.30@2212.85,5157.77
  Bottom Layer w10: v1(597.38,4388.86) 597.38,4406.68 724.7,4534 1148.7,4534 v1(1180.7,4566)
KEYSWIN_FU: C49.1 J15.1 R56.1 U5.29 | length 2837.6
  Top Layer w10: J15.1@281.77,4209.66 333.05,4209.66 414.7,4128 650.7,4128 698.57,4175.86 C49.1@707.68,4175.86 814.03,4175.86 v1(817.97,4171.93) ; v1(1448.2,4949.5) 1448.2,5119.5 1547,5218.3 2076,5218.3 2116.83,5177.46 U5.29@2212.85,5177.46
  Bottom Layer w10: v1(817.97,4171.93) 1162.09,4171.93 1235.7,4245.54 1235.7,4511 1245.7,4521 1245.7,4770 1425.2,4949.5 v1(1448.2,4949.5)
KEYSWIN_G1: C63.1 J9.1 R86.1 U5.63 | length 8447.1
  Top Layer w10: U5.63@2516,4697.15 2516,4442.53 2537.7,4420.82 2537.7,4316.72 2686.43,4168 4356.7,4168 v1@4372.7,4184 ; C63.1@7151.43,2880.3 7155.37,2884.23 R86.1@7155.37,2984.29 ; R86.1@7162.39,2991.31 7215.37,3044.3 7351.81,3044.3 7352.11,3044 7375.3,3044 7375.6,3044.3 7453.92,3044.3 J9.1@7556.23,2941.99
  Bottom Layer w10: v1(4374.7,4182) 4384.7,4192 4384.7,4309.09 4407.43,4331.82 4407.43,4742.64 4389.7,4760.37 4389.7,5056.65 4471.42,5138.37 6703.7,5138.37 6703.7,3480.34 7169.41,3014.63 v1(7169.41,2984.29)
KEYSWIN_G2: C65.1 J9.3 R90.1 U5.64 | length 8362.7
  Top Layer w10: U5.64@2535.68,4697.15 2535.68,4448.3 2555.7,4428.28 2555.7,4324.18 2691.88,4188 4312.7,4188 4343.7,4219 v1(4356.7,4219) ; R90.1@7286.63,2881.77 7286.63,2847.67 7295.3,2839 7326.12,2839 7341.24,2823.88 J9.3@7556.23,2823.88
  Top Layer w20: v1(7225.7,2987) 7226.41,2986.3 C65.1@7282.69,2986.3 7282.69,2885.71 R90.1@7286.63,2881.77
  Bottom Layer w10: v1(4356.7,4219) 4356.7,4306.54 4389.43,4339.27 4389.43,4735.18 4371.7,4752.91 4371.7,5064.11 4463.96,5156.37 6721.7,5156.37 6721.7,3487.8 7222.5,2987 v1(7225.7,2987)
KEYSWIN_H1: C27.1 J1.1 R13.1 U5.34 | length 4315.4
  Top Layer w10: J1.1@281.77,2646.71 325.99,2646.71 448.7,2524 658,2524 C27.1@707.68,2573.68 R13.1@817.36,2573.68 ; v1(817.36,2577) R13.1@817.97,2577.61 ; v1(1495.7,4917) 1697.7,5119 2005.3,5119 2045.26,5079.03 U5.34@2212.85,5079.03
  Bottom Layer w10: v1(817.36,2577) 1264.16,2577 1501.7,2814.54 v1@1501.7,4922
KEYSWIN_H2: C28.1 J1.2 R14.1 U5.35 | length 4269.5
  Top Layer w10: J1.2@281.77,2705.77 358.94,2705.77 C28.1@491.03,2573.68 R14.1@597.39,2573.68 ; v1(1459.7,4870) 1488.3,4870 1716.6,5098.3 1995,5098.3 2033.94,5059.35 U5.35@2212.85,5059.35
  Bottom Layer w10: v1(601.32,2577.61) 628.71,2605 1266.7,2605 1477.7,2816 1477.7,4847.6 v1@1457.5,4867.8
KEYSWIN_H3: C29.1 J1.3 R15.1 U5.36 | length 4054.1
  Top Layer w10: J1.3@281.77,2764.82 670.33,2764.82 C29.1@707.68,2802.18 R15.1@814.03,2802.18 ; v1(1441.7,4819) 1462.76,4819 1721.05,5077.3 1978,5077.3 2015.63,5039.66 U5.36@2212.85,5039.66
  Bottom Layer w10: v1(817.97,2806.11) 1375.27,2806.11 1459.7,2890.54 1459.7,4801 v1(1441.7,4819)
KEYSWIN_H4: C30.1 J1.4 R16.1 U5.38 | length 3962.5
  Top Layer w10: J1.4@281.77,2823.88 469.33,2823.88 487.1,2806.11 v1(601.32,2806.11) ; v1(1427.7,4768) 1437.21,4768 1669.11,4999.9 2212.45,4999.9 U5.38@2212.85,5000.29
  Bottom Layer w10: v1(601.32,2806.11) 629.32,2834.11 1377.82,2834.11 1441.7,2898 1441.7,4754 v1(1427.7,4768)
KEYSWIN_H5: C31.1 J1.5 R17.1 U5.39 | length 3800.9
  Top Layer w10: J1.5@281.77,2882.93 395.64,2882.93 456.7,2944 645.75,2944 C31.1@705.68,3003.93 709.61,3007.86 v1(815.97,3007.86) ; v1(1403.7,4713) 1412.3,4713 1679.52,4980.21 2212.45,4980.21 U5.39@2212.85,4980.61
  Bottom Layer w10: v1(815.97,3007.86) 1384.57,3007.86 1419.7,3043 1419.7,4697 v1(1403.7,4713)
KEYSWIN_I1: C50.1 J7.1 R59.1 U5.2 | length 5683.7
  Top Layer w10: U5.2@2732.53,5303.44 2732.53,5395.46 2780.07,5443 3639.25,5443 3752.25,5330 v1(3780.7,5330) ; C50.1@7057,5583.73 7060.94,5587.67 R59.1@7163.98,5587.67 ; R59.1@7164.7,5592 7164.7,5642 7468.63,5642 J7.1@7556.23,5554.41
  Bottom Layer w10: 3789.7,5342 3789.7,5372.6 3901.11,5484 3953,5484 3959,5490 4298.46,5490 4355.46,5547 5283.82,5547 5386.82,5650 7244.7,5650 7305.7,5589 7305.7,5564 7275.7,5534 7219.7,5534 7165.7,5588 v1(7165.7,5592)
KEYSWIN_I2: C71.1 J7.2 R65.1 U5.3 | length 5171.7
  Top Layer w10: U5.3@2712.85,5303.44 2712.85,5401.23 2772.62,5461 3646.7,5461 3749.2,5358.5 v1@3815.2,5358.5 ; C71.1@7270.94,5587.67 R65.1@7373.98,5587.67 7419.7,5587.67 7512.02,5495.35 J7.2@7556.23,5495.35
  Bottom Layer w10: v1(3817.7,5360) 3822.7,5360 3928.7,5466 4306,5466 4369,5529 5291.28,5529 5394.28,5632 7208.7,5632 7258.7,5582 7263.7,5582 v1(7264.7,5583)
KEYSWIN_J1: C56.1 J8.1 R71.1 U5.4 | length 4212.2
  Top Layer w10: J8.1@281.77,5318.19 329.96,5270 v1(404.7,5270) ; v1@404.7,5268 676.7,5268 711.61,5302.91 C56.1@711.61,5343.05 715.55,5346.99 R71.1@814.03,5346.99 ; U5.4@2693.16,5303.44 2693.16,5407 2765.16,5479 2882.7,5479 2922.7,5519 2922.7,5764 2881.7,5805 2775.7,5805 v1(2773.7,5807)
  Bottom Layer w20: v1(404.7,5270) 431.7,5270 463.7,5302 463.7,5605.6 714.11,5856 2733.58,5856 v1@2778.14,5811.44
KEYSWIN_J2: C59.1 J8.2 R77.1 U5.5 | length 3855.1
  Top Layer w10: J8.2@281.77,5377.24 368.46,5377.24 401.5,5344.21 C59.1@492.06,5344.21 594.47,5344.21 R77.1@598.41,5340.27 ; U5.5@2673.48,5303.44 2673.48,5412.78 2757.7,5497 2874.7,5497 2903.7,5526 2903.7,5757 2883.7,5777 v1(2847.7,5777)
  Bottom Layer w20: v1(430.7,5346) 431.7,5347 431.7,5613.2 702.51,5884 2745.18,5884 v1@2849.94,5779.24
KEYSWIN_M2: C62.1 J8.3 R85.1 U5.97 | length 3763.2
  Top Layer w10: J8.3@281.77,5436.3 376,5436.3 488.91,5549.21 C62.1@494.97,5549.21 R85.1@587.7,5549.21 ; U5.97@2819.15,5177.46 2896.17,5177.46 2896.17,5177.09 3210.25,5177.09 3286.7,5253.54 3286.7,5371 3268.7,5389 v1@3220.7,5389
  Bottom Layer w10: v1(587.7,5539) 597.7,5529 3126.7,5529 3197.7,5458 3197.7,5407 v1(3215.7,5389)
KEYSWIN_M3: C64.1 J7.3 R89.1 U5.98 | length 5115.9
  Top Layer w10: U5.98@2819.15,5197.14 2819.15,5197 3204.7,5197 3244.7,5237 v1(3244.7,5266) ; C64.1@7057,5346.73 7060.94,5350.67 R89.1@7163.98,5350.67 7249.61,5436.3 J7.3@7556.23,5436.3
  Bottom Layer w10: v1(3244.7,5266) 3791.67,5266 3955.67,5430 4320.91,5430 4383.91,5493 5306.19,5493 5324.98,5511.79 6881.75,5511.79 6914.96,5545 6968.7,5545 v1(7158.7,5355)
KEYSWIN_M4: C66.1 J7.4 R93.1 U5.1 | length 5168
  Top Layer w10: U5.1@2752.22,5303.44 2752.22,5389.69 2787.53,5425 3631.79,5425 3760.79,5296 v1(3761.7,5296) ; C66.1@7267,5346.73 7370.04,5346.73 R93.1@7373.98,5350.67 7400.55,5377.24 J7.4@7556.23,5377.24
  Bottom Layer w10: v1(3761.7,5296) 3796.21,5296 3948.21,5448 4313.46,5448 4376.46,5511 5298.73,5511 5317.52,5529.79 6874.3,5529.79 6907.51,5563 6990.3,5563 7186.7,5366.6 7186.7,5364.3 7199,5352 v1(7264.7,5352)
KEYSWLED_G1: R122.2 U5.65 | length 7966.9
  Top Layer w10: U5.65@2555.37,4697.15 2555.37,4454.07 2573.7,4435.73 2573.7,4331.63 2699.34,4206 4288.7,4206 4345.7,4263 4434.7,4263 v1(4446.7,4251) ; R122.2@7155.37,2769.3 v1(7156,2769.3)
  Bottom Layer w10: v1(4446.7,4251) 4443.43,4254.27 4443.43,4757.55 4425.7,4775.28 4425.7,5041.74 4486.33,5102.37 6667.7,5102.37 6667.7,3465.43 7055.7,3077.43 7055.7,2805.3 7091.7,2769.3 v1(7156,2769.3)
KEYSWLED_G2: R123.2 U5.66 | length 8277.9
  Top Layer w10: U5.66@2575.05,4697.15 2575.05,4459.84 2591.7,4443.19 2591.7,4339.09 2706.79,4224 4259.7,4224 v1@4285.7,4250 ; v1(7160.7,2821) 7318.67,2821 R123.2@7365.37,2774.3
  Bottom Layer w10: v1(4287.7,4252) 4287.7,4174 4309.7,4152 4393.7,4152 4402.7,4161 4402.7,4301.63 4425.43,4324.36 4425.43,4750.1 4407.7,4767.82 4407.7,5049.2 4478.88,5120.37 6685.7,5120.37 6685.7,3472.88 7073.7,3084.88 7073.7,2870.3 7123,2821 v1(7160.7,2821)
KJ_A1: C32.1 J4.1 R23.1 U5.96 | length 6229.2
  Top Layer w10: U5.96@2819.15,5157.77 4044.77,5157.77 4062,5175 v1(4062,5218)
  Top Layer w12: C32.1@7057,3874.6 v1(7057,3876.29) ; C32.1@7057,3877.3 7161,3877.3 7216,3932.3 7488.41,3932.3 7537,3883.7 7537,3839.74 J4.1@7556.23,3820.52
  Bottom Layer w12: v1(4062,5218) 4062,5225 4069,5225 4070.99,5223.01 4155.84,5307.85 6778.11,5307.85 6868.7,5217.26 6868.7,4006 6998.41,3876.29 v1(7057,3876.29)
KJ_A2: C36.1 J4.2 R31.1 U5.95 | length 6214.5
  Top Layer w10: U5.95@2819.15,5138.09 4063.09,5138.09 4099,5174 4099,5210 v1(4100,5211) ; C36.1@7267.02,3874.6 v1(7268.62,3873) ; C36.1@7283,3863.3 7368,3863.3 7373,3868.3 7462,3868.3 7472,3858.3 7472,3787.3 7497.83,3761.46 J4.2@7556.23,3761.46
  Bottom Layer w10: v1(4100,5211) 4100,5213.79 4175.05,5288.85 6770.24,5288.85 6849.7,5209.39 6849.7,3998.13 6999.54,3848.29 7243.92,3848.29 v1(7268.62,3873)
KJ_A3: C40.1 J4.3 R39.1 U5.93 | length 6410.1
  Top Layer w10: U5.93@2819.15,5098.72 3042.9,5098.72 3074.01,5067.61 3679.31,5067.61 3728.7,5117 4100,5117 4124,5141 4124,5181 v1(4127,5184)
  Top Layer w12: C40.1@7060.94,3670.67 R39.1@7163.98,3670.67 7205.54,3712.22 7546.41,3712.22 J4.3@7556.23,3702.41
  Bottom Layer w12: v1(4127,5184) 4129,5186 4129,5215.92 4182.92,5269.85 6762.37,5269.85 6830.7,5201.52 6830.7,3738 6894.1,3674.6 v1(7057,3674.6)
KJ_A4: C44.1 J4.4 R47.1 U5.92 | length 6481.2
  Top Layer w10: U5.92@2819.15,5079.03 3037.13,5079.03 3072.75,5043.41 3680.57,5043.41 3730.16,5093 4114,5093 4152,5131 v1(4152,5155) ; v1(7267.02,3674.6) 7370.06,3674.6 R47.1@7374,3670.66 7380.37,3664.3 7484,3664.3 7504.94,3643.35 J4.4@7556.23,3643.35
  Bottom Layer w10: v1(4152,5155) 4163,5166 4163,5223.05 4190.79,5250.85 6754.5,5250.85 6811.7,5193.65 6811.7,3720 6937.85,3593.85 7186.27,3593.85 v1(7267.02,3674.6)
KJ_A5: C33.1 J4.5 R24.1 U5.91 | length 6485.8
  Top Layer w10: U5.91@2819.15,5059.35 3031.35,5059.35 3070.41,5020.3 3682.91,5020.3 3737.62,5075 4140,5075 4180,5115 4180,5171 4204,5195 v1(4220,5195) ; C33.1@7066,3464.3 7160,3464.3 7169,3473.3 7169,3493.3 7203,3527.3 7411,3527.3 7468,3584.3 J4.5@7556.23,3584.3
  Bottom Layer w10: v1(4220,5195) 4239.85,5214.85 6739.59,5214.85 6775.7,5178.73 6775.7,3705.09 7015.79,3465 7035.7,3465
  other v1: 7055.61,3465
KJ_A6: C37.1 J4.6 R32.1 U5.88 | length 6537.3
  Top Layer w10: U5.88@2819.15,5000.29 3688.37,5000.29 3735.07,5047 4166,5047 4208,5089 v1(4208,5155) ; v1(7267.02,3462.68) C37.1@7267.02,3463.6 ; C37.1@7289,3468.3 7414,3468.3 7470.94,3525.24 J4.6@7556.23,3525.24
  Bottom Layer w10: v1(4208,5155) 4190,5173 4190,5181 4191,5182 4191,5225.6 4198.25,5232.85 6747.05,5232.85 6793.7,5186.19 6793.7,3712.54 7013.25,3493 7236.7,3493 v1(7267.02,3462.68)
KJ_A7: C41.1 J4.7 R40.1 U5.85 | length 6799.2
  Top Layer w10: U5.85@2819.15,4941.24 4136.95,4941.24 4262.85,5067.15 4262.85,5118.15 v1(4258,5123) ; C41.1@7057,3247.6 v1(7057,3250.3) ; C41.1@7061,3250.3 7167,3250.3 7167,3271.3 7208,3312.3 7403,3312.3 7423,3332.3 7423,3413.3 7475.89,3466.18 J4.7@7556.23,3466.18
  Bottom Layer w10: v1(4258,5123) 4265.6,5123 4321.45,5178.85 6724.68,5178.85 6739.7,5163.82 6739.7,3495.25 6984.66,3250.3 v1(7057,3250.3)
KJ_A8: C45.1 J4.8 R48.1 U5.84 | length 6770.2
  Top Layer w10: U5.84@2819.15,4921.55 4142.72,4921.55 ; 4142.72,4923.24 4144.4,4923.24 4294.7,5073.54 4294.7,5156.3 v1(4277,5174) ; C45.1@7296,3233.3 7382,3233.3 7384,3235.3 7384,3242.3 7447,3305.3 7447,3383.3 7470.83,3407.13 J4.8@7556.23,3407.13
  Bottom Layer w10: v1(4277,5174) 4299.85,5196.85 6732.14,5196.85 6757.7,5171.28 6757.7,3693 7018.7,3432 7201.7,3432 7267.02,3366.68 v1(7267.02,3247.6)
KJ_B1: C34.1 J5.1 R25.1 U5.41 | length 3651.7
  Top Layer w10: J5.1@281.77,3348.07 353.63,3348.07 381.7,3320 381.7,3217 455.7,3143 644.72,3143 R25.1@707.65,3205.93 810.06,3205.93 C34.1@814,3209.86 v1(818.57,3209.86) ; v1@1391.7,4661.4 1671.54,4941.24 U5.41@2212.85,4941.24
  Bottom Layer w10: v1(818.57,3209.86) 1345.57,3209.86 1400.7,3265 1400.7,4638 v1(1381.7,4657)
KJ_B2: C38.1 J5.2 R33.1 U5.42 | length 3567.3
  Top Layer w10: J5.2@281.77,3407.13 377.57,3407.13 414.7,3370 414.7,3227 435.78,3205.93 R33.1@491,3205.93 C38.1@593.42,3205.93 ; v1(1362.7,4584) 1377.3,4584 1714.86,4921.55 U5.42@2212.85,4921.55 ; v1@1369.7,4576.4 v1@1370,4576.7
  Bottom Layer w10: v1(600.57,3209.86) 778.97,3209.86 819.11,3250 1336.7,3250 1382.7,3296 1382.7,4558 v1@1369.7,4571
KJ_B3: C42.1 J5.3 R41.1 U5.43 | length 3327.5
  Top Layer w10: J5.3@281.77,3466.19 381.52,3466.19 481.7,3366 652.7,3366 698.7,3412 703.7,3412 R41.1@727.63,3435.93 ; R41.1@707.65,3435.93 R41.1@727.63,3435.93 ; C42.1@814,3439.86 810.06,3435.93 R41.1@727.63,3435.93 ; v1(1310.7,4461) 1294.7,4461 1278.7,4477 1278.7,4522 1299.7,4543 1362.7,4543 1721.58,4901.87 U5.43@2212.85,4901.87
  Bottom Layer w10: v1(814,3441.7) 1280.41,3441.7 1346.7,3508 1346.7,4423.6 1335.7,4434.6 1335.7,4436 v1(1310.7,4461)
KJ_B4: C46.1 J5.4 R49.1 U5.44 | length 3298.9
  Top Layer w10: J5.4@281.77,3525.24 400.46,3525.24 454.2,3471.5 454.2,3453.5 471.78,3435.93 R49.1@491,3435.93 593.42,3435.93 C46.1@597.35,3439.86 v1(606.84,3439.86) ; v1(1306.7,4506) 1359.88,4506 1736.07,4882.18 U5.44@2212.85,4882.18
  Bottom Layer w10: v1(606.84,3439.86) 640.84,3439.86 677,3403.7 1272.41,3403.7 1364.7,3496 1364.7,4478 1336.7,4506 v1(1306.7,4506)
KJ_B5: C35.1 J5.5 R26.1 U5.45 | length 2875
  Top Layer w10: J5.5@281.77,3584.3 416,3584.3 435.7,3604 642.66,3604 R26.1@707.65,3668.99 810.06,3668.99 v1(814,3672.92) ; v1@1296.7,4350.4 1346.7,4400.4 1346.7,4467.37 1741.84,4862.5 U5.45@2212.85,4862.5
  Bottom Layer w10: v1(814,3672.92) 1246.63,3672.92 1307.7,3734 1307.7,4259.46 1296.7,4270.46 v1(1296.7,4349)
KJ_B6: C39.1 J5.6 R34.1 U5.46 | length 3115.2
  Top Layer w10: J5.6@281.77,3643.35 416.08,3643.35 441.72,3668.99 R34.1@491,3668.99 C39.1@593.42,3668.99 ; v1(1318.7,4412) 1318.7,4410.6 1278.41,4370.3 1268.7,4360.6 1268.7,4337.4 1285.11,4321 1308.3,4321 1364.7,4377.4 1364.7,4459.91 1746.67,4841.88 2211.92,4841.88 U5.46@2212.85,4842.81
  Bottom Layer w10: v1(597.35,3672.92) 611.78,3672.92 658.7,3626 1232.7,3626 1325.7,3719 1325.7,4405 v1(1318.7,4412)
KJ_B7: C43.1 J5.7 R42.1 U5.47 | length 2715.8
  Top Layer w10: J5.7@281.77,3702.41 357.11,3702.41 392.7,3738 392.7,3819 397.7,3824 647.66,3824 R42.1@707.65,3883.99 C43.1@810.06,3883.99 ; v1(1263.7,4278) 1290.76,4278 1382.7,4369.95 1382.7,4452.46 1752.44,4822.19 2211.91,4822.19 U5.47@2212.85,4823.13
  Bottom Layer w10: v1(814,3887.92) 818.92,3883 1218.16,3883 1289.7,3954.54 1289.7,4252 v1(1263.7,4278)
KJ_B8: C47.1 J5.8 R50.1 U5.48 | length 2621
  Top Layer w10: J5.8@281.77,3761.46 349.17,3761.46 367.7,3780 367.7,3867 384.69,3883.99 R50.1@491,3883.99 593.42,3883.99 v1(597.35,3887.92) ; v1(1256.7,4214) 1256.7,4218.49 1400.7,4362.49 1400.7,4445 1759.15,4803.44 U5.48@2212.85,4803.44
  Bottom Layer w10: v1(597.35,3887.92) 625.35,3915.92 1225.63,3915.92 1256.7,3947 v1(1256.7,4214)
LCD_ONOFF: R45.2 R54.2 U5.58 | length 5398.8
  Top Layer w10: U5.58@2417.57,4697.15 2417.57,4422.87 2416.7,4422 2416.7,4396 2427.7,4385 v1(2427.7,4380) ; R45.2@3911.04,742.63 3948.96,742.63 R54.2@4027.7,821.37
  Bottom Layer w10: v1(2427.7,4380) 2427.7,4318 2437.7,4308 2437.7,2594.63 2557.34,2475 2931.34,2475 3082.7,2323.63 3082.7,802 3144.7,740 3914.7,740 v1(3915.7,741)
LCD_PWM: R53.2 R58.2 U5.59 | length 5268.8
  Top Layer w10: U5.59@2437.26,4697.15 2437.26,4419.44 2462.7,4394 2462.7,4348 v1(2455.7,4341) ; R53.2@3677.7,742.63 3715.63,742.63 R58.2@3794.37,821.37
  Bottom Layer w10: v1(2455.7,4341) 2455.7,2602.09 2564.79,2493 2938.79,2493 3100.7,2331.09 3100.7,848 3182.7,766 3778.7,766 3799.7,787 v1(3799.7,816)
LED1: R100.1 U5.53 | length 473.7
  Top Layer w10: R100.1@1950.28,4648.29 2004.57,4594 2283.7,4594 2319,4629.3 2319,4697 U5.53@2319.15,4697.15
LED2: R101.1 U5.54 | length 490.9
  Top Layer w10: R101.1@1945.28,4576.69 1945.97,4576 2297.7,4576 2338.83,4617.13 U5.54@2338.83,4697.15
LINE_IN_L: J12.6 J18.23 J18.24 | length 7582.4
  Top Layer w20: J18.23@3386.75,5763.97 J18.24@3386.75,5663.97 3386.75,5557.25 3448,5496 3670,5496 3754,5412 3857,5412 3879.7,5389.3 v1(3879.7,5285) ; v1(4340.7,4974) 4397.01,4974 4451.01,4920 v1(4544.7,4920) ; v1(6875.7,1735) 6875.7,1775.13 J12.6@7019.93,1919.36
  Bottom Layer w20: v1(3879.7,5285) 3879.7,5070.3 3923,5027 4287.7,5027 v1(4340.7,4974) ; v1(4544.7,4920) 4544.7,4681 4609.07,4616.63 5389.33,4616.63 5558.7,4786 6207.15,4786 6414.52,4578.63 6504.07,4578.63 6550.76,4531.94 6550.76,1813.94 6629.7,1735 v1(6875.7,1735)
LJ_G1: J9.6 Q1.3 | length 898.1
  Top Layer w20: Q1.3@7150.47,2631.29 7195.41,2631.29 7220.7,2606 7220.7,2481.58 7255.55,2446.74 7602.41,2446.74 7651.44,2495.77 7651.44,2614.85 7619.58,2646.71 J9.6@7556.23,2646.71
LJ_G2: J9.8 Q2.3 | length 241.6
  Top Layer w20: Q2.3@7360.47,2639.29 7391,2639.29 7501.69,2528.6 J9.8@7556.23,2528.6
MD_USBDN: J13.29 J13.30 | length 78.7
  Top Layer w20: J13.29@3714.51,3872.87 J13.30@3714.51,3951.61
MD_USBDP: J13.27 J13.28 | length 78.7
  Top Layer w20: J13.27@3635.77,3872.87 J13.28@3635.77,3951.61
MT1_CTRL: U5.40 | length 1.3
  Top Layer w10: U5.40@2211.91,4961.86 U5.40@2212.85,4960.92
MT2_CTRL: U5.83
NetC12_2: C12.2 D6.2 Q5.1 R20.2 R36.2 | length 522.1
  Top Layer w50: R20.2@5449.37,1505.3 5447.37,1507.3 C12.2@5447.37,1608.3 ; R36.2@5451.31,1850 5507.93,1793.38 D6.2@5507.93,1732.3 5447.37,1671.74 C12.2@5447.37,1608.3 ; Q5.1@5562.75,1577.8 5477.87,1577.8 C12.2@5447.37,1608.3
NetC76_1: C76.1 U6.2 | length 602.2
  Top Layer w20: C76.1@989.7,1516.63 974.7,1501.63 974.7,1029 998.2,1005.5 U6.2@1073.29,1005.5
NetC85_1: C85.1 U6.7 | length 350.4
  Top Layer w20: U6.7@1073.29,1255.5 1027.2,1255.5 1010.7,1272 1010.7,1428 1093.7,1511 C85.1@1093.7,1518.63
NetC87_2: C87.2 D9.2 Q6.1 R44.2 | length 464.5
  Top Layer w20: R44.2@4992.7,3439.63 5124.7,3571.63 D9.2@5124.7,3578.93
  Top Layer w30: D9.2@5124.7,3578.93 5185.15,3578.93 C87.2@5243.7,3520.37 5252.63,3520.37 Q6.1@5336.3,3436.69